# Altium PCB PCB1.PcbDoc
Units mm, origin at the board's own origin, x right, y up, seen from the top; angles counter-clockwise.
Board outline 50 x 60.07 mm, 2 copper layers (Top Layer, Bottom Layer); 14 components, 9 nets, 79 pads, 2 vias.
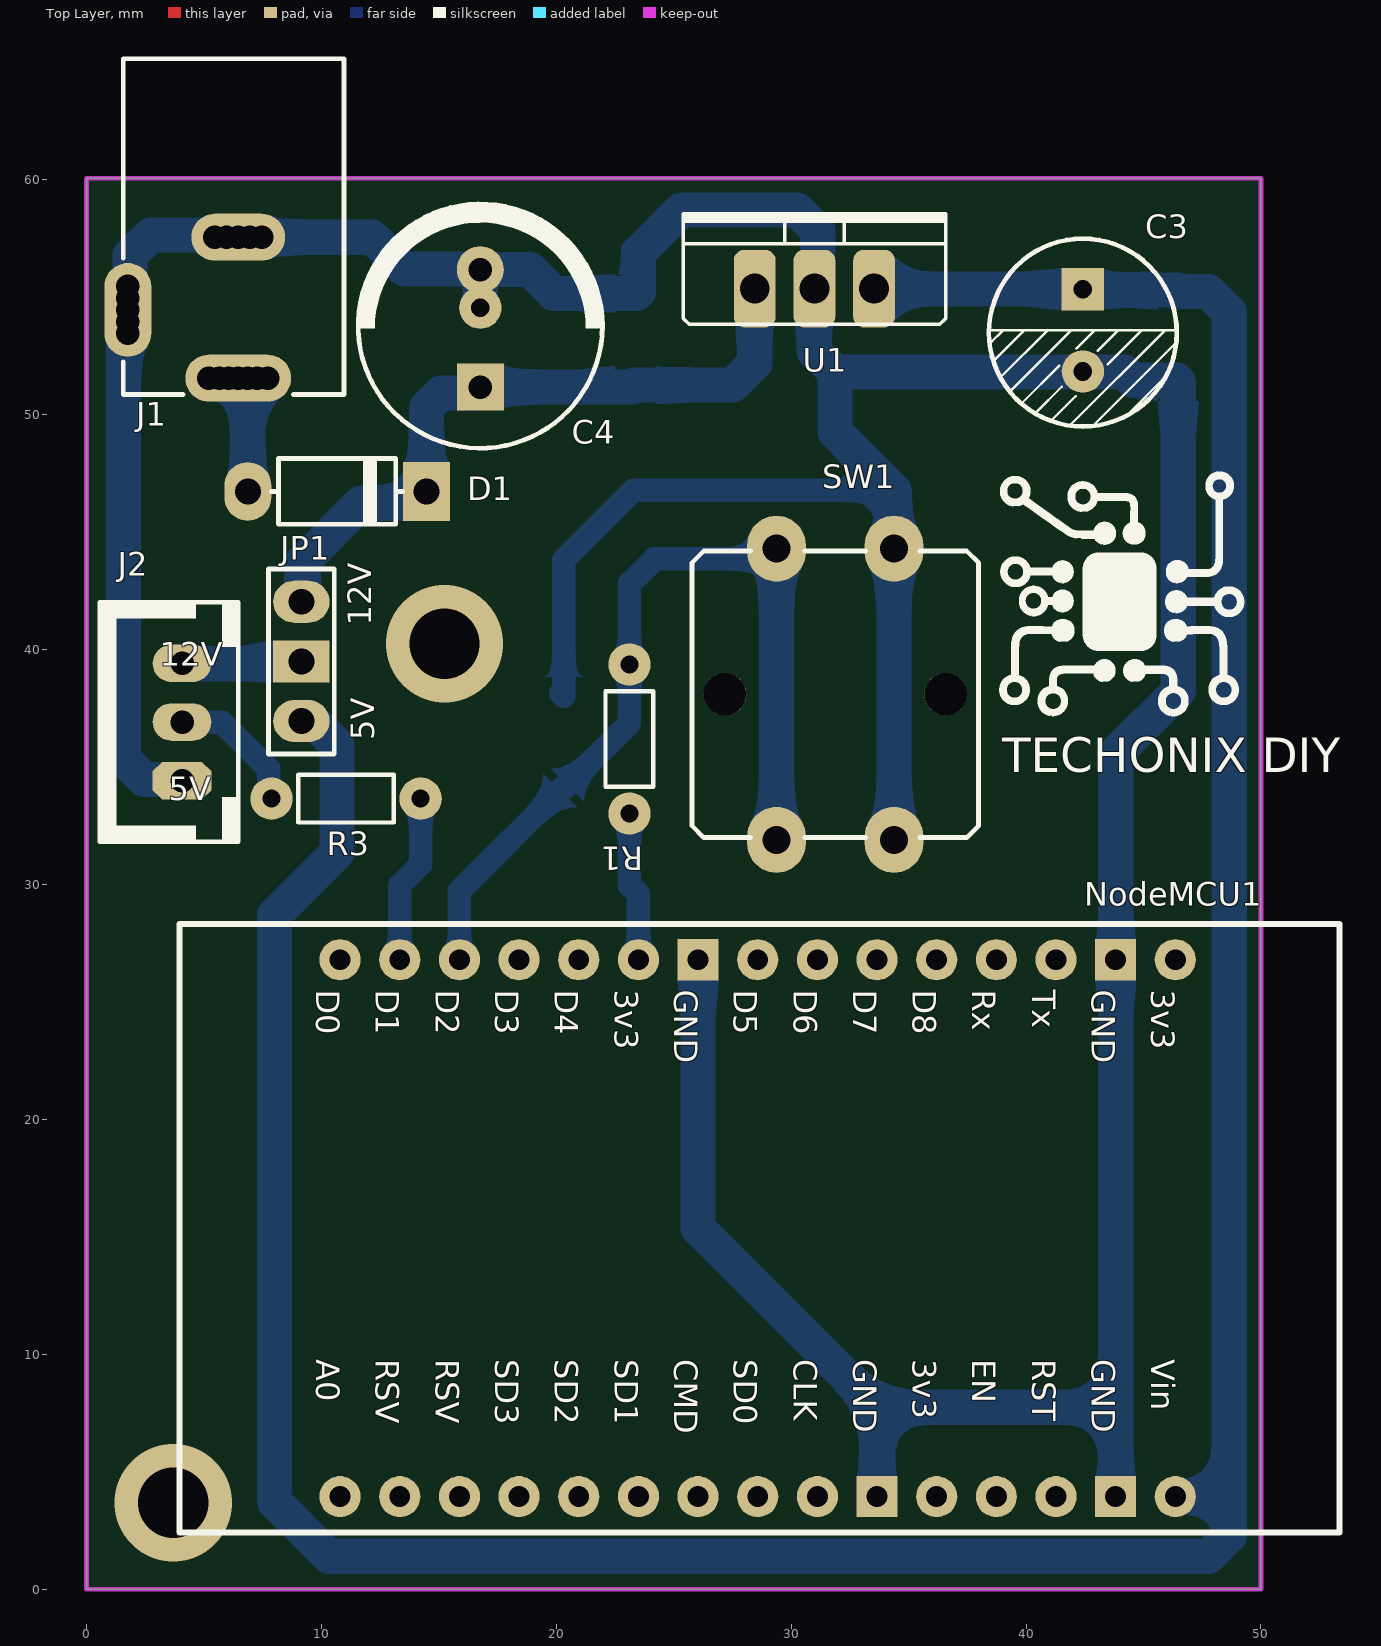
[diagram p0: Top Layer view]
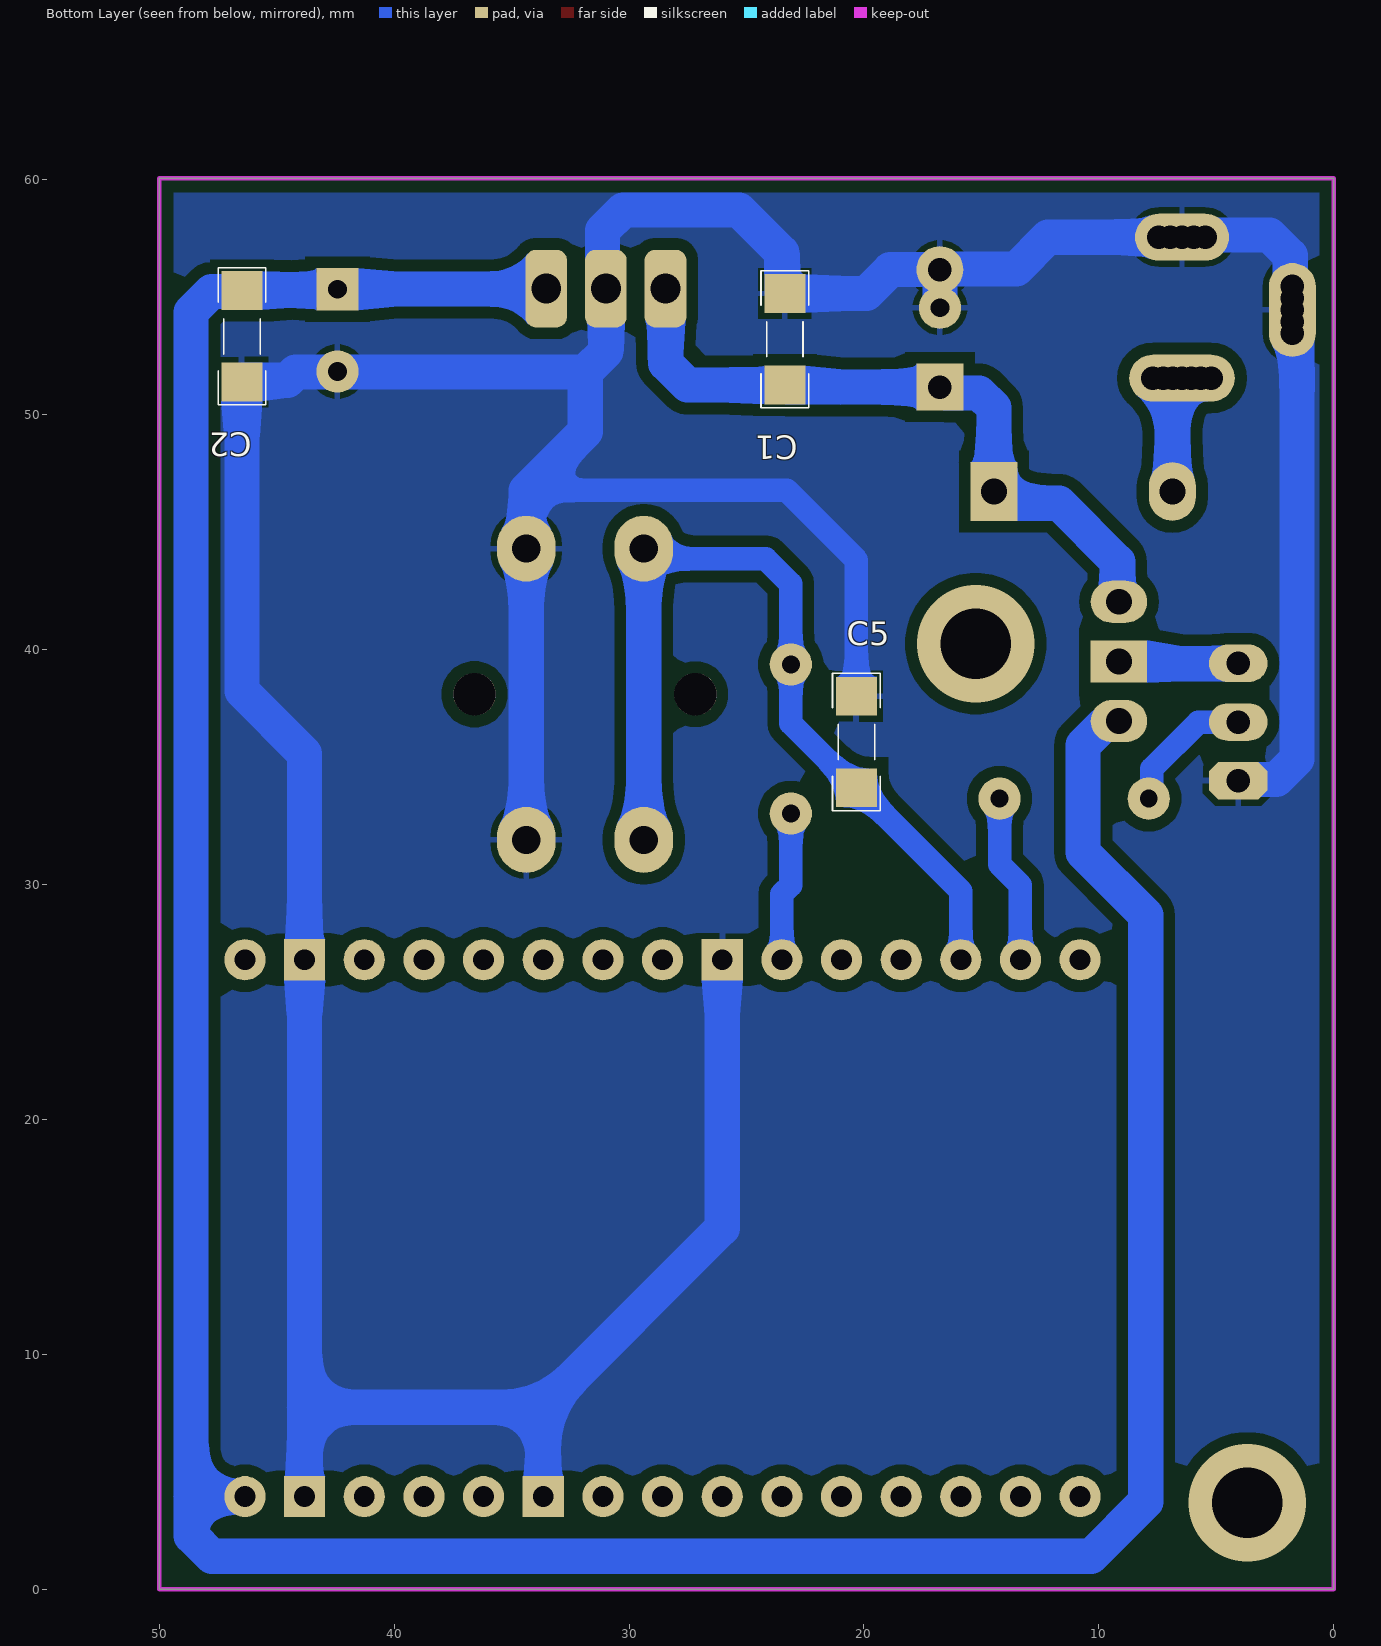
[diagram p1: Bottom Layer view, seen from below]
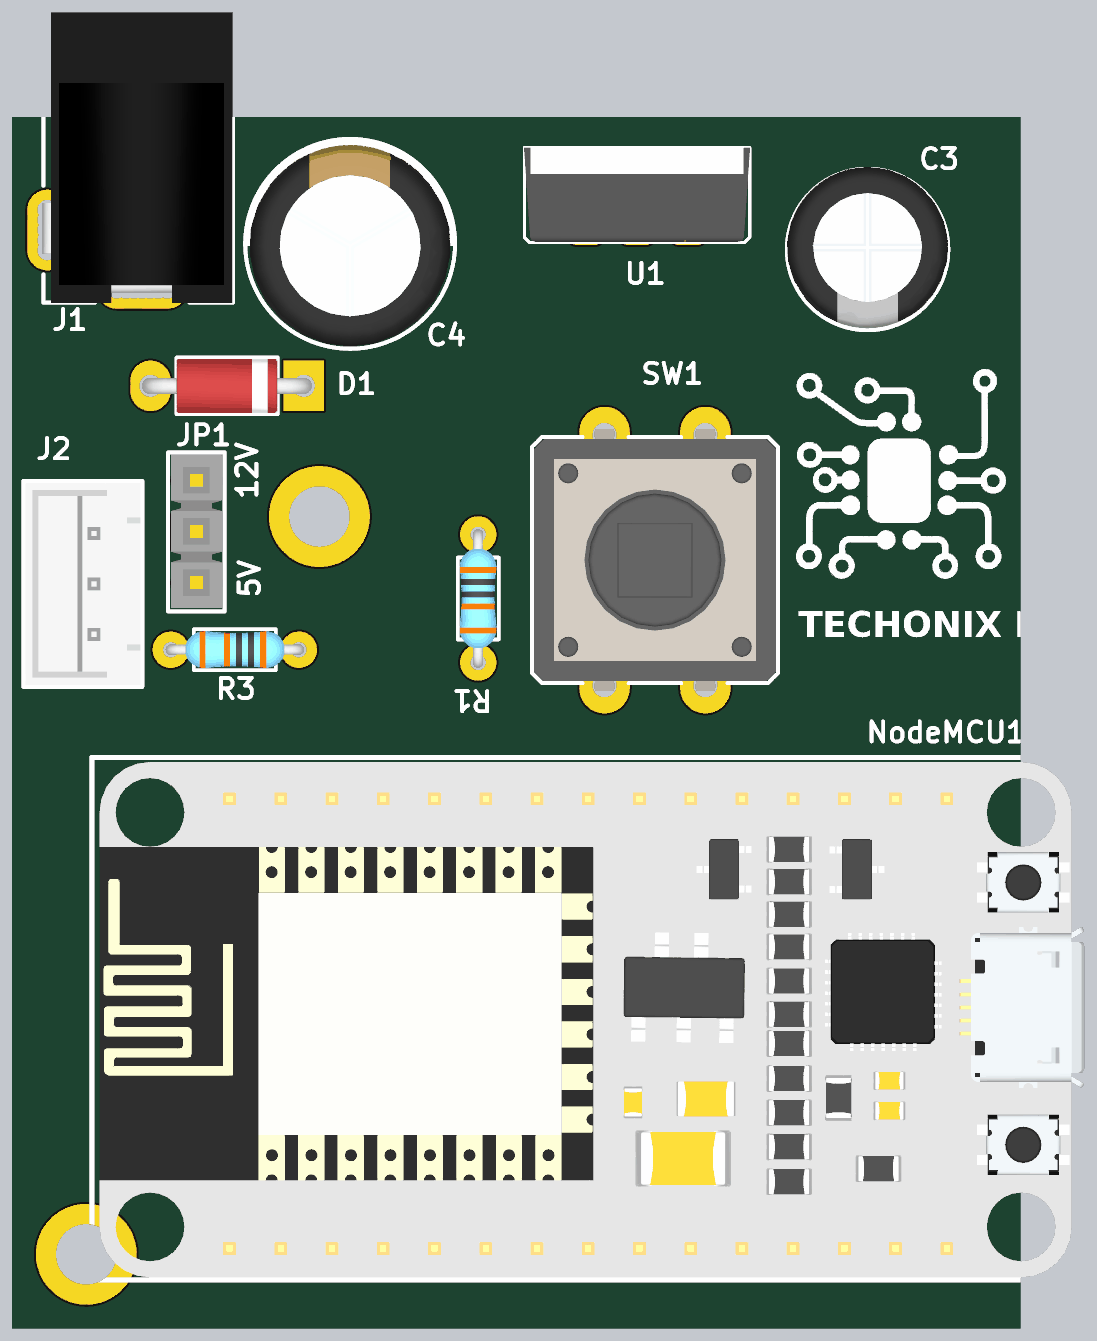
[diagram p2: 3D render of the assembled board from above, using the file's embedded part models]
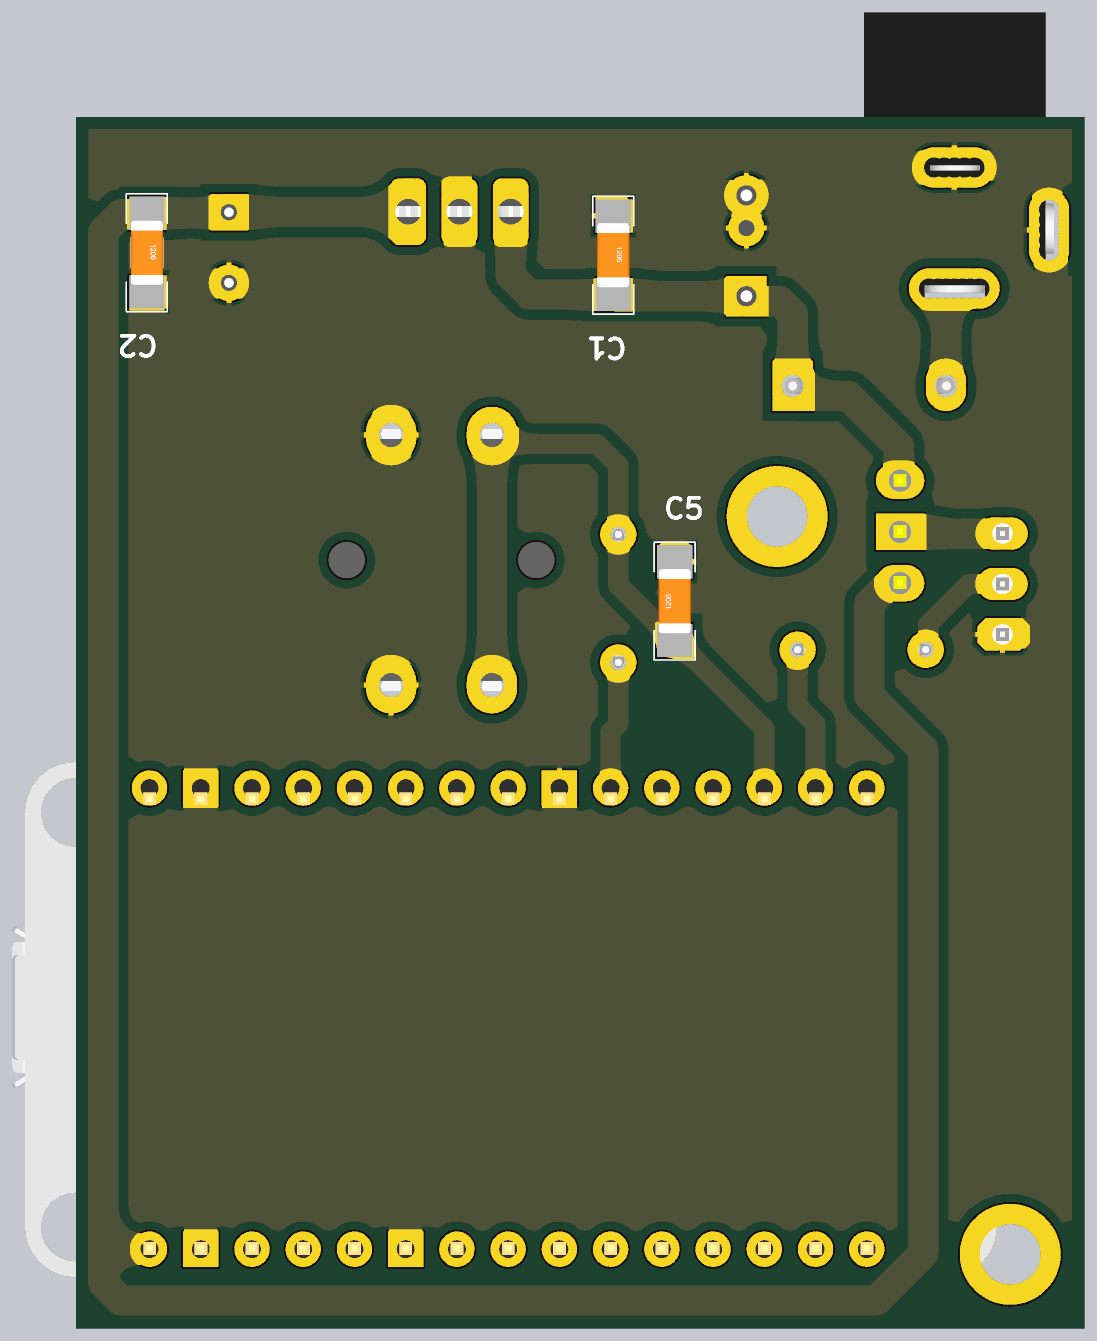
[diagram p3: 3D render of the assembled board from below, using the file's embedded part models]

## Layer stack, top to bottom
Top Solder: solder mask 0.0102, Solder Resist, Dk 3.5
Top Layer: signal copper 0.0356
Dielectric 1: dielectric 0.32, FR-4, Dk 4.8
Bottom Layer: signal copper 0.0356
Bottom Solder: solder mask 0.0102, Solder Resist, Dk 3.5

## Board outline
0,0 50,0 50,60.071 0,60.071

## Design rules (kind name [scope] priority, off if disabled: settings)
Clearance [All] p1: gap=0.5 ignorepadtopadclearanceinfootprint=FALSE
PolygonConnect [All] p1: connectstyle=Relief reliefconductorwidth=0.254 reliefentries=4 polygonreliefangle="90 Angle" airgapwidth=0.254
RoutingVias [All] p1: holewidth=0.711 width=1.27 viastyle="Through Hole" minholewidth=0.711 minwidth=1.27 maxholewidth=0.711 maxwidth=1.27
SolderMaskExpansion [All] p1: expansion=0.102 istentingtop=FALSE
SupplyNets "Schematic Supply Nets_3" [InNet('GND')] p1: voltage=0.000
SupplyNets "Schematic Supply Nets_2" [InNet('5V')] p2: voltage=0.000
SupplyNets "Schematic Supply Nets_1" [InNet('3V3')] p3: voltage=0.000
SupplyNets "Schematic Supply Nets" [InNet('12V')] p4: voltage=0.000
Width [All] p1: maxlimit=1.5 minlimit=0.5 preferedwidth=1
30 further rules are at their usual default settings.

## Components (designator, comment, footprint, x,y, rotation, side; value= is the part's Value field where it differs from the comment)
C1 "0.1uF" CAPC4817X12N 23.368,53.213 r270 bottom
C2 "0.1uF" CAPC4817X12N 46.482,53.34 r270 bottom
C3 "100uF50V" "Cap electrolitic radial 8x12-3.5" 42.418,53.594 r270 top
C4 "100uF50V" "Cap electrolitic radial 10x20-5" 16.764,53.681 r90 top
C5 "0.1uF" CAPC4817X12N 20.32,36.068 r90 bottom
D1 "1N4007" "DO41 P7.5MM" 10.668,46.736 r0 top
J1 "DC Power Jack" "DC Power Jack 1" 7.258,51.562 r270 top
J2 "XH_3" XH_3 4.064,36.917 r90 top
JP1 "Jumper" "jumper selector" 9.144,36.957 r90 top
NodeMCU1 "NodeMCU DevKit v1.0" NODEMCU 9.195,29.464 r270 top
R1 "10K" Res-(1/4) 23.114,36.195 r270 top
R3 "10K" Res-(1/4) 11.049,33.655 r180 top
SW1 "PUSHBUTTON" SWPBT_SPDT_10X10X7 31.877,38.1 r270 top
U1 "L7805" to220-123-v 28.448,55.372 r0 top

## Footprints (in the part's own frame and the unit in brackets; to place one, negate y for a bottom-side part, rotate by r counter-clockwise, add the part's x,y. Pads: shape width x height; smd on the part's side, far side on the other; paste and mask are expansions set on the pad)
"Cap electrolitic radial 8x12-3.5" [mm] "Cap electrolitic radial 8x12-3.5-Design:Abbas Basereh"
  rect 1.8x1.8 hole 0.8: 1(-1.75,0)
  round 1.8 hole 0.8: 2(1.75,0)
  silkscreen extent -3.9,-4 4.1,4, body extent -4,-4 4,4, height 12.3
"Cap electrolitic radial 10x20-5" [mm] "Cap electrolitic radial 10x20-5-Design:Abbas Basereh"
  rect 2x2 hole 1: 1(-2.5,0)
  round 1.8 hole 0.8: 2(0.875,0)
  round 2 hole 1: 2(2.5,0)
  silkscreen extent -5.1,-5.2 5.3,5.2, body extent -5,-5 5,5, height 20
CAPC4817X12N [mm] "Chip Capacitor, 2-Leads, Body 4/80x1/70mm, IPC Medium Density-Design:Abbas Basereh"
  rect 1.65x1.75 smd: 1(-1.95,0) 2(1.95,0)
  silkscreen extent -2.92,-1.02 2.92,1.02, body extent -1.6,-0.8 1.6,0.8, height 1
"DC Power Jack 1" [mm] "Power Adaptor Jack"
  round 1.5 hole 1: 1(0,0.45) 1(0,0) 1(0,-0.4) 1(0,-1.2) 1(0,-1.6) 1(0,-2.05) 2(-6,-1.8) 2(-6,0.2) 2(-6,-1.3) 2(-6,-0.3) 3(-3.9,-5.5) 3(-3.4,-5.5) 3(-2.4,-5.5) 3(-1.9,-5.5)
  oval 2x4.5 hole 1: 1(0,-0.8)
  oval 2x4 hole 1: 2(-6,-0.8)
  oval 4x2 hole 1: 3(-2.9,-5.5)
  silkscreen extent -13.59,-5.7 0.7,3.7, body extent -13.68,-5.74 0.72,3.66, height 11.05
"DO41 P7.5MM" [mm] "1N4007"
  oval 2x2.5 hole 1.1: 1(-3.8,0)
  rect 2x2.5 hole 1.1: 2(3.8,0)
  silkscreen extent -2.8,-1.4 2.8,1.4, body extent -4.22,-1.33 4.19,1.33, height 3.03
"jumper selector" [mm]
  oval 1.8x2.4 hole 1.1: 1(0,0) 3(5.08,0)
  rect 1.8x2.4 hole 1.1: 2(2.54,0)
  silkscreen extent -1.4,-1.4 6.48,1.4, body extent -1.24,-1.27 6.38,1.27, height 10.16
NODEMCU [mil]
  round 69 hole 35: 1(105,1463) 3(105,1263) 4(105,1163) 5(105,1063) 6(105,963) 7(105,863) 8(105,763) 10(105,563) 11(105,463) 12(105,363) 13(105,263) 14(105,163) 15(105,63) 16(1005,63) 17(1005,163) 18(1005,263) 19(1005,363) 20(1005,463) 21(1005,563) 22(1005,663) 23(1005,763) 24(1005,863) 26(1005,1063) 27(1005,1163) 28(1005,1263) 30(1005,1463)
  rect 69x69 hole 35: 2(105,1363) 9(105,663) 25(1005,963) 29(1005,1363)
  silkscreen extent 45,-206 1065,1738, body extent 54,-191 1060,1731, height 309
Res-(1/4) [mm]
  round 1.8 hole 0.762: 1(-3.175,0) 2(3.175,0)
  silkscreen extent -2.03,-1.02 2.03,1.02, body extent -3.43,-0.93 3.43,0.91, height 2.92
SWPBT_SPDT_10X10X7 [mm] "SWITCH, PUSHBUTTON, THD, SPDT,"
  oval 2.8x2.5 hole 1.2 mask+0.1: 1(-6.2,2.5) 2(-6.2,-2.5) 3(6.2,-2.5) 4(6.2,2.5)
  round 1.8 hole 1.8 unplated: ""(0,4.7) ""(0,-4.7)
  silkscreen extent -6.1,-6.1 6.1,6.1, body extent -6.5,-6 6.5,6, height 7.3
to220-123-v [mil] "TO220 123 pin numbering Vertical mount"
  rrect50% 70x130 hole 50: 1(0,0) 2(100,0) 3(200,0)
  silkscreen extent -120,-60 320,125, body extent -121,-59 321,126, height 945
XH_3 [mm] "PW10-x-M, JST-BxB-XH-A pitch: 2.5mm, 3A/250v"
  oct 1.6x2.5 hole 1: 1(-2.5,0)
  oval 1.6x2.5 hole 1: 2(0,0) 3(2.5,0)
  silkscreen extent -5.1,-2.4 5.1,3.5, body extent -5,-2.3 5,3.4, height 7

## Part data
C1 C2 C5: library part "CAP SMD 1206", "CAP 1206", Data=16-12-2016, Desc.="CAP SMD 1206", designer="Abbas Basereh"
C3 C4: library part "Cap ELECTROLITIC TOTAL SIZE", "Cap electrolitic radial", Data=16-12-2016, designer="Abbas Basereh"
D1: library part "1N4007 (THD)", "Diode Standard 1000V 1A Through Hole DO-204AL (DO-41)", PartNumber=1N4007
J1: "DC Power Jack. Center Pin 2.5mm. Diameter: 5.7mm", Adding Date=10/21/2009, Company=Personal, designer="Ali Hafizi", Project Name=Laser
J2: "PW10-x-M, JST-BxB-XH-A pitch: 2.5mm, 3A/250v", MANF=JST, MANF_P#=B3B-XH-A, PARAM=3.0A, PARAM2=250v
JP1: library part "Jumper Selector", "Jumper Selector"
R1 R3: library part Resistor, "Resistor", Power="1/4 W", Tolerance=5%
SW1: library part SWPBT_SPDT_10X10X7, "SWITCH, PUSH BUTTON, TACTILE, THD, SPDT, 10X10X7mm", ASSEMBLY=ASSEMBLY, DESC=DESCRIPTION, MANF=-, MANF_P#=-, PARAM=PARAM, Price=PRICE
U1: library part L7805-TO220, "LINEAR REGULATOR 5.0V", Supplier Part Number 1=511-L7805ACP, Supplier 1=Mouser

## Via types
v1: diameter 5, hole 3, Top Layer to Bottom Layer, 2 vias

## Nets (pads, with @x,y where several pads share a name; then routed paths per layer and width w, separated by ;. In a path a pad name is that pad's centre, name@x,y a point inside that pad or via, vN(x,y) a via of type N, cw(c..) or ccw(c..) an arc to the next point about the centre after c; other vN are vias at no path point)
3V3: NodeMCU1.10 R1.2 | length 6.4
  Bottom Layer w1: R1.2 23.114,29.972 23.495,29.591 NodeMCU1.10
5V: C2.1 C3.1 JP1.1 NodeMCU1.30 U1.3 | length 147.2
  Bottom Layer w1.5: JP1.1 9.525,36.957 9.675,36.807 9.789,36.807 10.668,35.928 10.668,31.369 8.001,28.702 8.001,3.724 10.328,1.397 47.762,1.397 48.641,2.276 48.65,2.276 48.65,3.937 ; U1.3 33.542,55.358 42.404,55.358 C3.1 42.445,55.317 46.455,55.317 C2.1 46.527,55.245 47.771,55.245 48.65,54.366 48.65,3.937 ; NodeMCU1.30 48.65,3.937
12V: C1.2 C4.1 D1.2 JP1.3 U1.1 | length 29.9
  Bottom Layer w1.5: JP1.3 9.196,42.089 9.196,43.74 11.692,46.236 14.218,46.236 14.468,46.486 14.468,50.302 15.097,50.931 16.514,50.931 C4.1 23.236,51.181 23.318,51.263 C1.2 27.514,51.263 28.448,52.197 U1.1
BTN: C5.1 NodeMCU1.13 R1.1 SW1.2 SW1.3 | length 38.3
  Bottom Layer w1: NodeMCU1.13 15.875,29.723 20.27,34.118 20.37,34.118 23.114,36.862 23.114,42.799 24.178,43.863 28.94,43.863 SW1.2
  Bottom Layer w1.5: SW1.3 SW1.2
DATA: NodeMCU1.14 R3.1 | length 7.2
  Bottom Layer w1: NodeMCU1.14 13.335,29.972 14.224,30.861 R3.1
DATA_OUT: J2.2 R3.2 | length 5.8
  Bottom Layer w1: J2.2 4.07,36.911 5.761,36.911 7.748,34.924 7.748,33.781 R3.2
GND: C1.1 C2.2 C3.2 C4.2 C5.2 J1.2 J1.3 J2.1 NodeMCU1.2 NodeMCU1.9 NodeMCU1.25 NodeMCU1.29 SW1.1 SW1.4 U1.2 | length 205.7
  Bottom Layer w1: C5.2@20.193,38.145 C5.2 20.32,43.815 23.281,46.776 34.377,46.776
  Bottom Layer w1.5: J1.3@1.758,54.462 1.758,53.962 1.758,53.327 1.564,53.133 1.564,35.346 2.443,34.467 4.014,34.467 J2.1 ; J1.3@1.854,55.462 1.854,56.779 2.732,57.658 3.975,57.658 6.362,57.658 J1.2@6.458,57.562 ; J1.2@7.458,57.562 12.161,57.562 13.514,56.209 16.736,56.209 C4.2@16.764,56.181 ; C4.2@16.764,54.556 C4.2@16.764,56.181 ; NodeMCU1.9 26.035,15.367 33.655,7.747 ; U1.2@30.983,55.367 30.983,52.7 31.867,51.816 ; U1.2 31.127,55.511 31.127,57.842 30.248,58.721 25.32,58.721 23.493,56.894 23.493,55.238 23.418,55.163 C1.1 19.894,55.163 18.876,56.181 C4.2@16.764,56.181 ; NodeMCU1.25 33.655,7.747 ; SW1.4 SW1.1 34.377,46.776 31.867,49.286 31.867,51.816 ; C3.2@42.39,51.816 31.867,51.816 ; C3.2 42.446,51.816 44.196,51.816 44.547,51.465 46.407,51.465 C2.2 46.482,38.233 43.815,35.566 NodeMCU1.2 43.815,7.747 ; NodeMCU1.29 43.815,7.747 ; 33.655,7.747 43.815,7.747
NetD1_1: D1.1 J1.1 | length 4.8
  Bottom Layer w1.5: J1.1@6.858,51.562 6.858,46.746 D1.1
NetJ2_3: J2.3 JP1.2 | length 5.3
  Bottom Layer w1.5: J2.3@3.81,39.417 3.829,39.398 JP1.2@9.144,39.398
pads on no net: NodeMCU1.1 NodeMCU1.3 NodeMCU1.4 NodeMCU1.5 NodeMCU1.6 NodeMCU1.7 NodeMCU1.8 NodeMCU1.11 NodeMCU1.12 NodeMCU1.15 NodeMCU1.16 NodeMCU1.17 NodeMCU1.18 NodeMCU1.19 NodeMCU1.20 NodeMCU1.21 NodeMCU1.22 NodeMCU1.23 NodeMCU1.24 NodeMCU1.26 NodeMCU1.27 NodeMCU1.28 SW1.
copper on no net:
  other v1: 3.683,3.683 15.24,40.259

## Polygon pours and split planes (outlines as drawn)
GND on Bottom Layer "GND_L02_P000" (solid, remove dead copper, pour order 0): 0,60.071 59.563,60.071 59.563,0 0,0

## Keep-outs
Keep-Out Layer:
  the board outline again, w0.2

## Silkscreen, mask and mechanical layers (free items; w line width, h text height)
Top Overlay:
  drawing of 11 lines, arcs and shapes, not listed
  text "12V" at 12.13,41.025 h1 r90
  text "12V" at 3.111,39.306 h1
  text "5V" at 12.246,36.141 h1 r90
  text "TECHONIX DIY" at 38.989,34.297 h2.5
  text "5V" at 3.492,33.591 h1

## Text inside footprints (layer, text, board x,y; h text height)
NodeMCU1: Top Overlay "Vin" at 45.339,9.779 h1 r270; Top Overlay "GND" at 42.799,9.779 h1 r270; Top Overlay "RST" at 40.259,9.779 h1 r270; Top Overlay "EN" at 37.719,9.779 h1 r270; Top Overlay "3v3" at 35.179,9.779 h1 r270; Top Overlay "GND" at 32.639,9.779 h1 r270; Top Overlay "CLK" at 30.099,9.779 h1 r270; Top Overlay "SD0" at 27.559,9.779 h1 r270; Top Overlay "CMD" at 25.019,9.779 h1 r270; Top Overlay "SD1" at 22.479,9.779 h1 r270; Top Overlay "SD2" at 19.939,9.779 h1 r270; Top Overlay "SD3" at 17.399,9.779 h1 r270; Top Overlay "RSV" at 14.859,9.779 h1 r270; Top Overlay "RSV" at 12.319,9.779 h1 r270; Top Overlay "A0" at 9.779,9.779 h1 r270; Top Overlay "D0" at 9.779,25.527 h1 r270; Top Overlay "D1" at 12.319,25.527 h1 r270; Top Overlay "D2" at 14.859,25.527 h1 r270; Top Overlay "D3" at 17.399,25.527 h1 r270; Top Overlay "D4" at 19.939,25.527 h1 r270; Top Overlay "3v3" at 22.479,25.527 h1 r270; Top Overlay "GND" at 25.019,25.527 h1 r270; Top Overlay "D5" at 27.559,25.527 h1 r270; Top Overlay "D6" at 30.099,25.527 h1 r270; Top Overlay "D7" at 32.639,25.527 h1 r270; Top Overlay "D8" at 35.179,25.527 h1 r270; Top Overlay "Rx" at 37.719,25.527 h1 r270; Top Overlay "Tx" at 40.259,25.527 h1 r270; Top Overlay "GND" at 42.799,25.527 h1 r270; Top Overlay "3v3" at 45.339,25.527 h1 r270